# Allegro board Naftanaila Bianca 431E PDCE I 2023-2024.brd
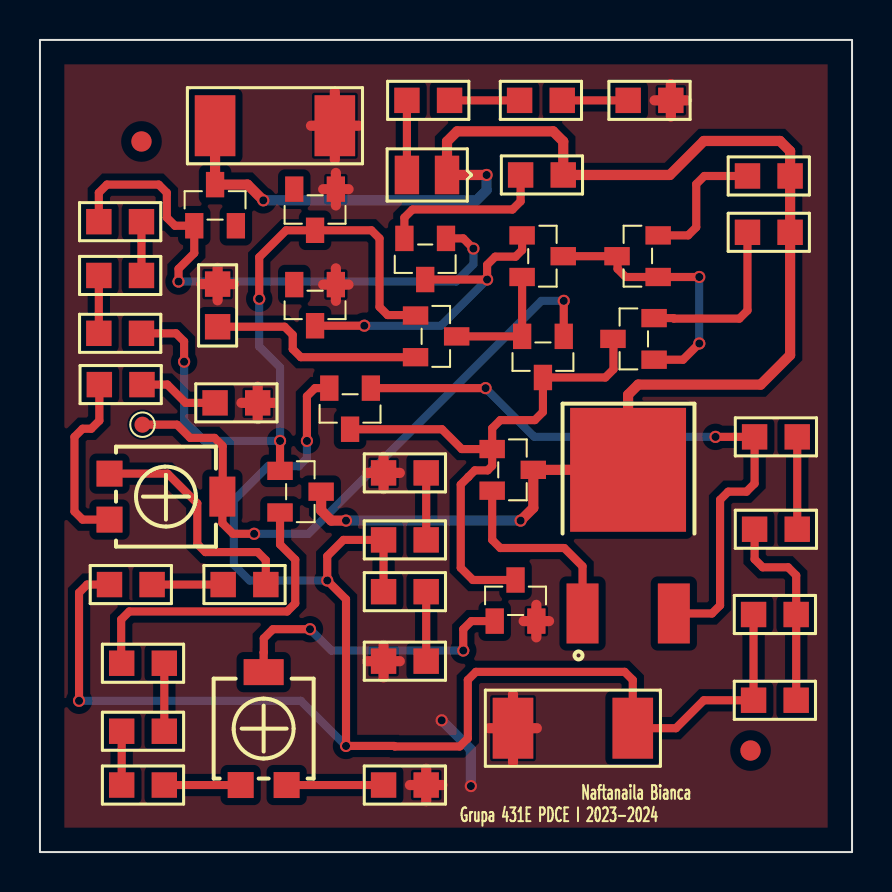
[diagram p0: board, top side]
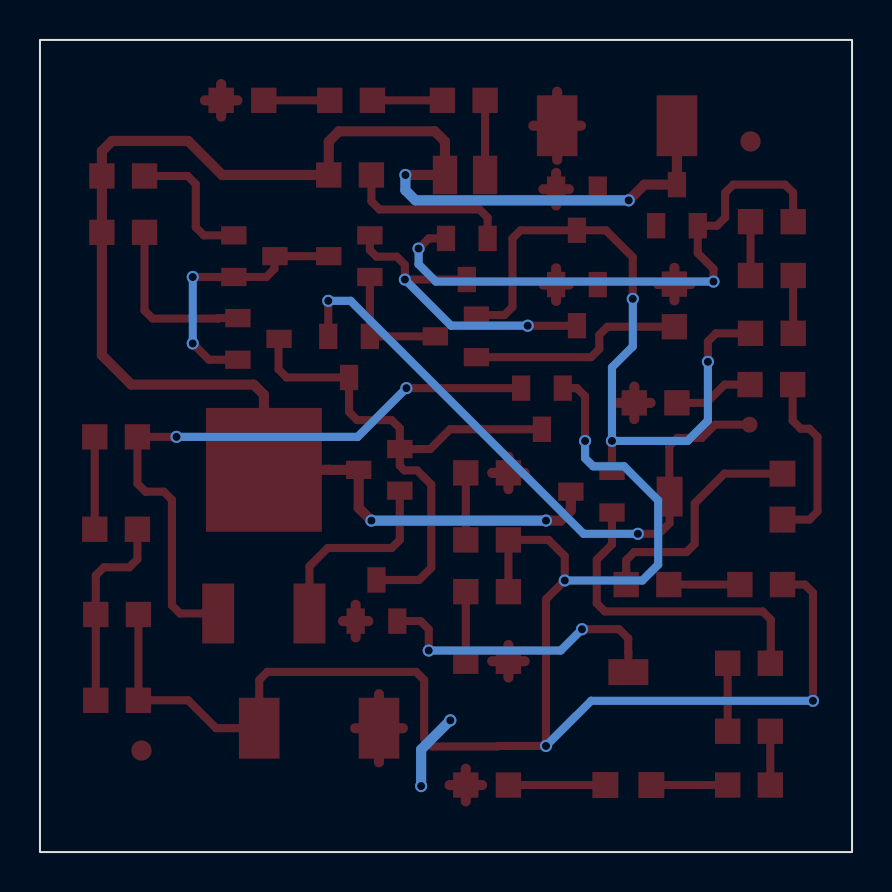
[diagram p1: board, bottom side, seen from below]

Outline 40.64 x 40.64 mm; copper layers: TOP, BOTTOM. Coordinates in mm from the lower left corner of the outline.
Outline path: rectangle 0,0 40.64,40.64

## Design rules (mm)
nets with their own width: min track width 0.406; nets N193871 N193885 N193891 N193973 N194101 N194107 N194113 N194259 N194281 N194287 N194321 N194357 N194447 N194511 N194587 N194603 N194663 N194671 N194713 N194717 N194805 N194837 N194849 N194923 N195023 N195045 N195057 N195081 N195219 N195233 N198689 N198695 OUT
nets with their own width: min track width 0.508; nets 0 VCC

## Placement (name value [footprint] x y rotation side)
D4  BZX84-C2V7  [TO236AA]  7.72 31.34 270 top
D5  BZX84-C2V7  [TO236AA]  14.81 33.17 90 top
D7  BZX84-C5V1  [TO236AA]  14.81 28.4 90 top
D9  SMLS14BET  [SMD080521]  18.36 33.88 180 top
J1  CON2  [SMR2512]  29.67 6.2 180 top
J2  CON2  [SMR2512]  8.76 36.35 0 top
J3  CON1  [TP80]  5.13 21.39 0 top
NOREF  -  [unnamed]  5.08 35.56 0 top
NOREF#2  -  [#2]  40.64 0 90 top
NOREF#3  -  [unnamed]  35.56 5.08 0 top
NOREF#4  -  [#2]  0 40.64 0 top
P1  5k  [TS53YL]  3.48 16.64 180 top
P2  100  [TS53YL]  12.34 3.35 270 top
Q1  QBC807-25  [TO236AA]  30.94 28.78 0 top
Q2  QBC817-25  [TO236AA]  24.13 30.86 180 top
Q3  QBC817-25  [TO236AA]  26.21 25.81 90 top
Q4  QBC807-25  [TO236AA]  30.73 24.64 0 top
Q5  QBC817-25  [TO236AA]  18.8 26.85 180 top
Q19  QBC807-25  [TO236AA]  20.32 30.71 90 top
Q20  QBC817-25  [TO236AA]  16.56 23.22 90 top
Q21  QBC817-25  [TO236AA]  22.76 11.56 270 top
Q22  QBC817-25  [TO236AA]  12.01 19.08 180 top
QESR1  QBC846B  [TO236AA]  22.63 20.17 180 top
QESR2  QMJD31C  [DPACK]  27.15 11.94 0 top
R2  220  [SMR0805]  24.05 33.88 0 top
R4  1k  [SMR0805]  2.95 31.55 0 top
R6  2.7k  [SMR0805]  3.48 13.39 0 top
R8  220  [SMR0805]  8.89 26.29 90 top
R9  4.7k  [SMR0805]  2.97 23.39 0 top
R10  220  [SMR0805]  35.41 33.83 0 top
R11  220  [SMR0805]  35.41 31.01 0 top
R12  3.3k  [SMR0805]  9.17 13.39 0 top
R14  1k  [SMR0805]  5.08 28.85 180 top
R15  1k  [SMR0805]  2.95 25.96 0 top
R17  910  [SMR0805]  18.36 37.62 0 top
R18  910  [SMR0805]  24 37.62 0 top
R19  910  [SMR0805]  29.44 37.62 0 top
R27  470  [SMR0805]  8.76 22.48 0 top
R28  150  [SMR0805]  17.2 3.35 0 top
R29  220  [SMR0805]  4.09 9.45 0 top
R30  150  [SMR0805]  4.09 3.35 0 top
R34  220  [SMR0805]  6.22 6.05 180 top
RC1  1  [SMR0805]  35.76 20.78 0 top
RC2  0.47  [SMR0805]  37.9 16.15 180 top
RC3  0.47  [SMR0805]  37.85 11.89 180 top
RC4  0.47  [SMR0805]  37.85 7.59 180 top
RLOAD8  910  [SMR0805]  17.2 15.62 0 top
RLOAD9  910  [SMR0805]  17.2 13.03 0 top
RLOAD10  680  [SMR0805]  19.33 9.55 180 top
RLOAD11  680  [SMR0805]  19.33 18.97 180 top

## Library data of the parts
D4 = BZX84-C2V7_4
D5 = BZX84-C2V7_5
D7 = BZX84-C5V1_2
D9 = SMLS14BET_4
J1 J2 = CON2
J3 = CON1
P1 P2 = POT
Q1 = QBC807-25_4
Q2 = QBC817-25_6
Q3 = QBC817-25_7
Q4 = QBC807-25_5
Q5 = QBC817-25_10
Q19 = QBC807-25_3
Q20 = QBC817-25_8
Q21 = QBC817-25_11
Q22 = QBC817-25_9
QESR1 = QBC846B_1
QESR2 = QMJD31C_0
R2 R4 R6 R8-R12 R14 R15 R17-R19 R27-R30 R34 RC1-RC4 RLOAD8-RLOAD11 = R

## Footprints (pads in the part's own frame, mm; a bottom-side part is the same pattern mirrored in y, then rotated)
DPACK
  rect 1.6x3 smd: 1(0,0) 3(4.57,0)
  rect 5.8x6.2 smd: 2(2.28,7.19)
SMD080521
  rect 1.219x1.93 smd: 1(0,0) 2(-2.007,0)
SMR0805
  rect 1.27x1.27 smd: 1(0,0) 2(2.134,0)
SMR2512
  rect 2.032x3.048 smd: 1(0,0) 2(5.994,0)
TO236AA
  rect 1.27x0.914 smd: 1(0,0) 2(0,2.083) 3(-2.057,1.041)
TP80
  round 0.8 smd: 1(0,0)
TS53YL
  rect 1.3x1.3 smd: 1(0,0) 3(0,-2.3)
  rect 1.3x2 smd: 2(-5.65,-1.15)
unnamed
  round 1.016 smd: (0,0)

## Nets
VCC: D4.3 D9.2 J2.1 Q22.3 QESR1.3 QESR2.2 R2.2 R10.2 R11.2
0: D5.1 D7.1 J1.2 J2.2 Q21.2(E) R8.2 R19.2 R27.2 R28.2 RLOAD10.2 RLOAD11.2
OUT: J1.1 Q20.2(E) R6.1 RC3.2 RC4.2 RLOAD8.1 RLOAD9.1
N193871: Q20.1 QESR2.3(E) RC1.1
N193885: RC1.2 RC2.1
N193891: RC2.2 RC3.1 RC4.1
N193973: QESR1.2(E) QESR2.1
N194101: Q4.2(E) R11.1
N194107: Q3.3 Q4.3 Q20.3 Q21.3 QESR1.1
N194113: Q1.2(E) R10.1
N194259: R6.2 R12.1
N194281: Q19.2(E) R2.1
N194287: Q1.1 Q1.3 Q2.3 Q4.1
N194321: D4.1 Q19.1 R4.1
N194357: D9.1(C) R17.1
N194447: P1.3 R12.2
N194511: D7.3 Q2.1 Q19.3
N194587: R17.2 R18.1
N194603: J3.1 P1.2(T) Q3.1
N194663: Q2.2(E) Q3.2(E) Q5.3
N194671: P1.1 R9.1
N194713: R18.2 R19.1
N194717: R4.2 R14.1
N194805: D5.3 Q5.1 Q22.1 R15.2
N194837: Q22.2(E) R29.1
N194849: R14.2 R15.1
N194923: R29.2 R34.1
N195023: R9.2 R27.1
N195045: R30.1 R34.2
N195057: Q5.2(E) R8.1
N195081: P2.3 R30.2
N195219: P2.2(T) Q21.1
N195233: P2.1 R28.1
N198689: RLOAD9.2 RLOAD10.1
N198695: RLOAD8.2 RLOAD11.1

Pads without a net: D4 2; D5 2; D7 2

## Via types
v1: diameter 0.61, hole 0.406, TOP to BOTTOM, 25 vias

## Routing (per net, layer and track width the routed paths; a pad name or vN(x,y) marks a point on that pad's centre or on a via; arc(x,y) is an arc through that point)
VCC: length 83.3
  TOP w0.508: J2.1 D4.3 10.39,33.4 v1(11.18,32.61) ; v1(15.32,16.59) 14.58,16.59 14.07,17.09 Q22.3 ; v1(22.35,33.88) D9.2 20.37,35.56 20.88,36.07 25.68,36.07 26.19,35.56 R2.2 31.52,33.88 33.22,35.59 37.03,35.59 37.54,35.08 R10.2 R11.2 37.54,24.87 36.07,23.39 29.94,23.39 29.43,22.89 QESR2.2 26.15,19.13 26.15,19.13 QESR1.3 24.69,17.22 v1(24.05,16.59)
  BOTTOM w0.508: v1(22.35,33.88) 22.35,33.12 21.84,32.61 v1(11.18,32.61) ; v1(15.32,16.59) v1(24.05,16.59)
0: length 43.7
  TOP w0.508: D7.1 15.44,28.4 ; D7.1 14.81,29.21 ; D7.1 14.17,28.4 ; D7.1 14.81,27.58 ; 24.84,10.74 Q21.2 ; Q21.2 24.21,11.56 ; Q21.2 24.84,12.37 ; Q21.2 25.48,11.56 ; 16.38,9.55 RLOAD10.2 ; RLOAD10.2 17.2,8.74 ; RLOAD10.2 17.2,10.36 ; RLOAD10.2 18.01,9.55 ; 8.89,27.61 R8.2 ; R8.2 8.08,28.42 ; R8.2 9.7,28.42 ; R8.2 8.89,29.24 ; D5.1 15.44,33.17 ; D5.1 14.81,33.99 ; D5.1 14.17,33.17 ; D5.1 14.81,32.36 ; 16.38,18.97 RLOAD11.2 ; RLOAD11.2 18.01,18.97 ; RLOAD11.2 17.2,19.79 ; RLOAD11.2 17.2,18.16 ; J1.2 23.67,7.9 ; J1.2 22.48,6.2 ; J1.2 23.67,4.5 ; J1.2 24.87,6.2 ; J2.2 14.76,38.05 ; J2.2 15.95,36.35 ; J2.2 13.56,36.35 ; J2.2 14.76,34.65 ; R28.2 20.14,3.35 ; R28.2 19.33,2.54 ; R28.2 18.52,3.35 ; R28.2 19.33,4.17 ; 10.9,21.67 R27.2 ; R27.2 10.08,22.48 ; R27.2 10.9,23.29 ; R27.2 11.71,22.48 ; 31.57,36.8 R19.2 ; R19.2 30.76,37.62 ; R19.2 32.39,37.62 ; R19.2 31.57,38.43
  BOTTOM w0.508: v1(20.1,6.59) 21.56,5.13 v1(21.56,3.3)
OUT: length 85.3
  TOP w0.406: RLOAD9.1 RLOAD8.1 15.19,15.62 14.38,14.81 v1(14.38,13.59) 15.32,12.65 v1(15.32,5.31) 17.73,5.31 17.75,5.28 21.01,5.28 21.41,5.69 21.41,8.61 21.82,9.02 29.26,9.02 29.67,8.61 J1.1 31.83,6.2 33.22,7.59 RC4.2 RC3.2 ; v1(1.96,7.57) 1.96,12.98 2.36,13.39 R6.1 ; Q20.2 13.77,23.22 13.36,22.81 v1(13.36,20.57)
  BOTTOM w0.406: v1(13.36,20.57) 13.36,19.71 12.95,19.3 11.4,19.3 9.7,17.6 9.7,14.38 10.49,13.59 v1(14.38,13.59) ; v1(1.96,7.57) 13.06,7.57 v1(15.32,5.31)
N193871: length 32.4
  TOP w0.406: QESR2.3 33.63,11.94 34.04,12.34 34.04,17.63 34.44,18.03 35.36,18.03 35.76,18.44 RC1.1 v1(33.81,20.78) ; Q20.1 v1(22.3,23.22)
  BOTTOM w0.406: v1(33.81,20.78) 24.74,20.78 v1(22.3,23.22)
N193885: length 4.6
  TOP w0.406: RC2.1 RC1.2
N193891: length 10.2
  TOP w0.406: RC2.2 35.76,14.66 36.17,14.25 37.44,14.25 37.85,13.84 RC3.1 RC4.1
N193973: length 9.9
  TOP w0.406: QESR1.2 22.63,15.62 23.04,15.21 26.24,15.21 27.15,14.3 QESR2.1
N194101: length 8.8
  TOP w0.406: R11.1 35.41,27.1 35,26.7 31.72,26.7 31.7,26.72 Q4.2
N194107: length 28.4
  TOP w0.406: Q4.3 28.7,25.65 28.7,24.16 28.3,23.75 Q3.3 25.17,22.02 24.77,21.62 23.04,21.62 22.63,21.21 QESR1.1 ; Q20.3 20.12,21.16 21.11,20.17 QESR1.1 ; QESR1.1 22.63,19.33 22.4,19.1 21.76,19.1 21.44,18.77 21.44,18.77 21.06,18.39 21.06,14.22 21.67,13.61 Q21.3
N194113: length 7
  TOP w0.406: R10.1 33.25,33.83 32.84,33.43 32.84,31.27 32.44,30.86 Q1.2
N194259: length 3.6
  TOP w0.406: R6.2 R12.1
N194281: length 8.5
  TOP w0.406: R2.1 24.05,32.56 23.65,32.16 18.64,32.16 18.24,31.75 Q19.2
N194287: length 13.5
  TOP w0.406: Q4.1 32.18,24.64 v1(32.99,25.45) ; v1(32.99,28.78) Q1.1 29.31,28.78 28.91,29.18 28.91,29.79 Q1.3 Q2.3
  BOTTOM w0.406: v1(32.99,25.45) v1(32.99,28.78)
N194321: length 28.6
  TOP w0.406: R4.1 2.95,32.99 3.35,33.4 5.94,33.4 6.35,32.99 6.35,31.75 6.76,31.34 D4.1 7.72,29.97 6.93,29.18 v1(6.93,28.55) ; v1(21.69,30.2) 21.18,30.71 Q19.1
  BOTTOM w0.406: v1(21.69,30.2) 21.69,29.41 20.83,28.55 v1(6.93,28.55)
N194357: length 3.7
  TOP w0.406: R17.1 D9.1
N194447: length 12
  TOP w0.406: P1.3 6.39,18.94 7.87,17.45 7.87,15.42 8.28,15.01 10.9,15.01 11.3,14.61 11.3,13.39
N194511: length 16.2
  TOP w0.406: Q19.3 v1(22.38,28.65) 22.38,29.39 22.78,29.79 23.8,29.79 24.13,30.12 Q2.1 ; D7.3 v1(16.23,26.34)
  BOTTOM w0.406: v1(16.23,26.34) 20.07,26.34 v1(22.38,28.65)
N194587: length 3.5
  TOP w0.406: R18.1 R17.2
N194603: length 32.2
  TOP w0.406: v1(26.21,27.58) Q3.1 ; v1(10.72,15.93) 9.66,15.93 9.13,16.46 P1.2 9.14,17.8 9.14,20.32 8.74,20.73 7.52,20.73 6.86,21.39 J3.1
  BOTTOM w0.406: v1(26.21,27.58) 25.09,27.58 13.43,15.93 v1(10.72,15.93)
N194663: length 6.2
  TOP w0.406: Q2.2 Q3.2 Q5.3
N194671: length 9
  TOP w0.406: R9.1 2.97,21.59 2.57,21.18 2.13,21.18 1.73,20.78 1.73,17.04 2.13,16.64 P1.1
N194713: length 3.3
  TOP w0.406: R19.1 R18.2
N194717: length 2.7
  TOP w0.406: R14.1 R4.2
N194805: length 34.8
  TOP w0.406: v1(12.01,20.57) Q22.1 ; v1(10.97,27.69) 10.97,29.77 12.32,31.11 D5.3 16.59,31.11 16.99,30.71 16.99,27.28 17.4,26.87 18.77,26.87 Q5.1 ; R15.2 6.81,25.96 7.21,25.55 v1(7.21,24.54)
  BOTTOM w0.406: v1(10.97,27.69) 10.97,25.3 12.01,24.26 v1(12.01,20.57) 8.23,20.57 7.21,21.59 v1(7.21,24.54)
N194837: length 16.1
  TOP w0.406: Q22.2 12.01,15.39 12.78,14.63 12.78,12.45 12.37,12.04 4.47,12.04 4.06,11.63 4.06,9.47 R29.1
N194849: length 2.9
  TOP w0.406: R14.2 R15.1
N194923: length 3.4
  TOP w0.406: R34.1 R29.2
N195023: length 4
  TOP w0.406: R27.1 7.29,22.48 6.38,23.39 R9.2
N195045: length 2.7
  TOP w0.406: R34.2 R30.1
N195057: length 11
  TOP w0.406: R8.1 12.24,26.29 12.65,25.88 12.65,25.17 13.06,24.77 Q5.2
N195081: length 3.8
  TOP w0.406: R30.2 P2.3
N195219: length 15.1
  TOP w0.406: P2.2 11.19,9.98 11.2,9.99 11.2,10.69 11.66,11.15 v1(13.51,11.15) ; v1(21.18,10.08) 21.18,11.15 21.59,11.56 Q21.1
  BOTTOM w0.406: v1(21.18,10.08) 14.58,10.08 v1(13.51,11.15)
N195233: length 4.9
  TOP w0.406: P2.1 R28.1
N198689: length 3.5
  TOP w0.406: RLOAD10.1 RLOAD9.2
N198695: length 3.4
  TOP w0.406: RLOAD11.1 RLOAD8.2

## Copper pours and planes (outline as drawn; the poured copper is in the pictures)
0 on TOP: 1.22,1.22 1.22,39.42 39.42,39.42 39.42,1.22 ; 18 cut-outs

## Text on the board
Ref Des/Silkscreen Top: Grupa 431E PDCE I 2023-2024 | Naftanaila Bianca
XSECTION_CHART: *  SURFACE | L1 TOP CONDUCTOR | *  DIELECTRIC | L2 BOTTOM CONDUCTOR | DESIGN CROSS SECTION CHART | ___________________________ | TOTAL THICKNESS 64 MIL | 1-2
DIMENSION: FIGURE | FINISHED_SIZE | 16.0 | ALL UNITS ARE IN MILS | DRILL CHART: TOP to BOTTOM | PLATED | QTY | 25 | TOTAL HOLES:
